# EAGLE board eagle (EAGLE 8.4.0)
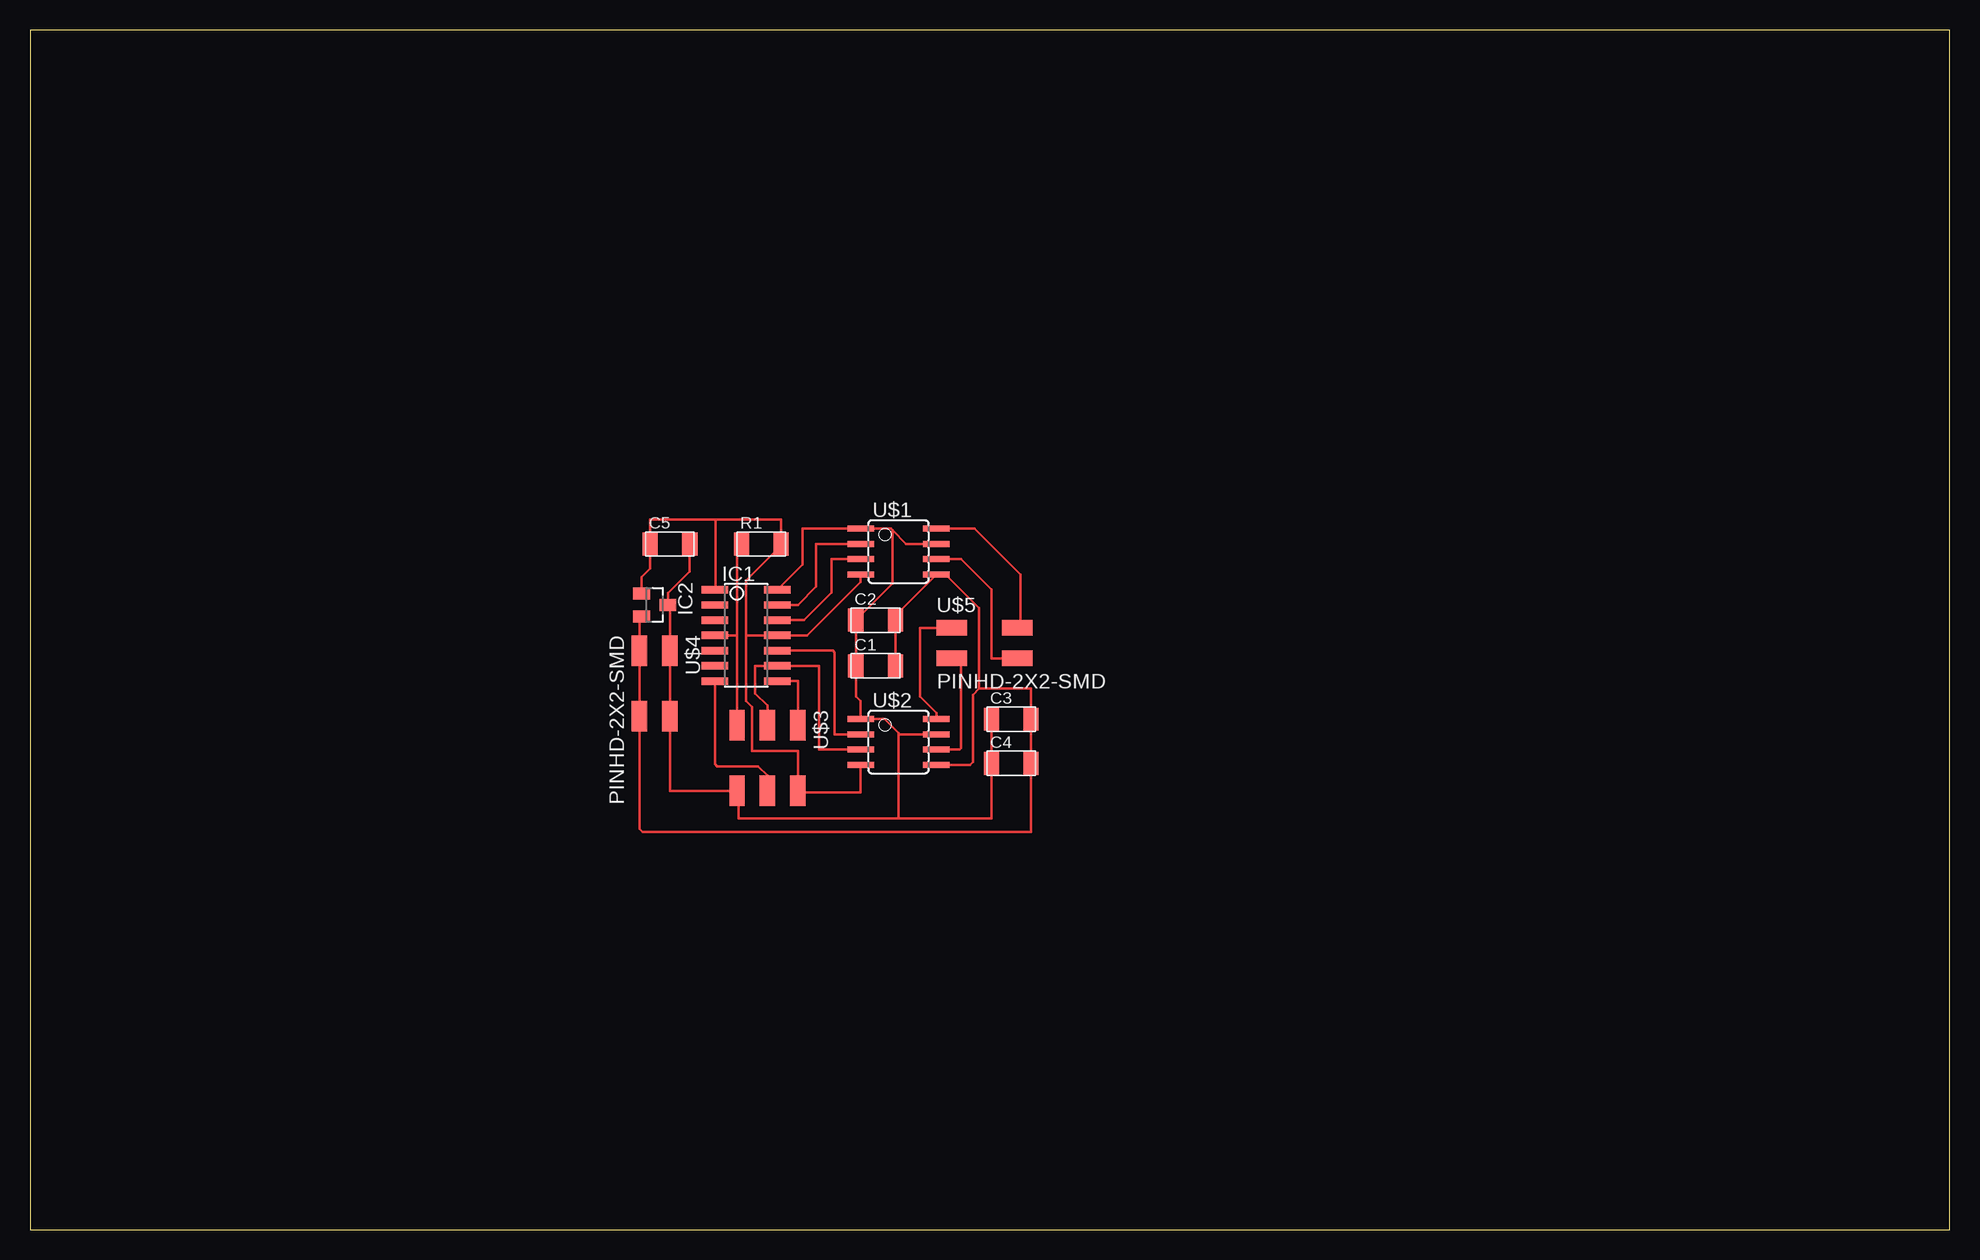
[diagram p0: board, top side]

Size 160 x 100 mm. Coordinates in mm from the lower left corner, seen from the top.
Outline: 0,0 160,0 160,100 0,100 0,0
Copper layers (1*16): Top 0.035mm / dielectric 1.5mm / Bottom 0.035mm
Design rules "default": minimum track width 6mil, minimum drill 0.35mm, track to track 6mil, track to pad 6mil, pad to pad 6mil, via to via 6mil, smd to smd 6mil, copper to edge 40mil, drill to drill 6mil, minimum pad ring 10mil, minimum via ring 8mil, stop-mask expansion 4mil, vias tented up to drill 0mil, thermal gap 10mil

## Footprints (pad centres in the part's own frame; a part is rotated, then mirrored left to right if it is on the bottom)
C1206FAB = smd 1.27 x 1.905: 1 -1.651,0; 2 1.651,0
SOIC14 = smd 0.61 x 2.21: 1 -3.81,-2.603; 2 -2.54,-2.603; 3 -1.27,-2.603; 4 0,-2.603; 5 1.27,-2.603; 6 2.54,-2.603; 7 3.81,-2.603; 8 3.81,2.603; 9 2.54,2.603; 10 1.27,2.603; 11 0,2.603; 12 -1.27,2.603; 13 -2.54,2.603; 14 -3.81,2.603
SOT23 = smd 1 x 1.4: 1 -0.95,-1.1; 2 0.95,-1.1; 3 0,1.1
R1206FAB = smd 1.27 x 1.905: 1 -1.651,0; 2 1.651,0
SOIC8 = smd 0.5 x 2.2: 1 -1.905,-3.154; 2 -0.645,-3.154; 3 0.625,-3.154; 4 1.895,-3.154; 5 1.905,3.154; 6 0.635,3.154; 7 -0.635,3.154; 8 -1.905,3.154
2X03SMD = smd 2.54 x 1.27: 1 -2.54,2.54; 2 2.92,2.54; 3 -2.54,0; 4 2.92,0; 5 -2.54,-2.54; 6 2.92,-2.54
2X02SMD = smd 2.54 x 1.27: 1 -2.54,1.27; 2 2.92,1.27; 3 -2.54,-1.27; 4 2.92,-1.27

## Placement (x,y rotation side)
C1  CAP-US1206FAB  [C1206FAB]  70.48,46.99 0 top
C2  CAP-US1206FAB  [C1206FAB]  70.48,50.8 0 top
C3  CAP-US1206FAB  [C1206FAB]  81.79,42.55 0 top
C4  CAP-US1206FAB  [C1206FAB]  81.79,38.86 0 top
C5  CAP-US1206FAB  [C1206FAB]  53.34,57.15 0 top
IC1  ATTINY44-SSU  [SOIC14]  59.69,49.53 270 top
IC2  [SOT23]  52.07,52.07 270 top
R1  [R1206FAB]  60.96,57.15 0 top
U$1  A4953-H-BRIDGE-MOTOR-DRIVER  [SOIC8]  72.39,56.52 270 top
U$2  A4953-H-BRIDGE-MOTOR-DRIVER  [SOIC8]  72.39,40.64 270 top
U$3  AVRISPSMD  [2X03SMD]  61.47,39.5 270 top
U$4  PINHD-2X2-SMD  [2X02SMD]  52.07,45.72 270 top
U$5  PINHD-2X2-SMD  [2X02SMD]  79.38,48.9 0 top

## Library data of the parts
C1-C5 IC1 IC2 R1 U$1-U$5 = fab (1)

## Nets
N$1: C1.1 C2.1 C3.1 C4.1 C5.2 IC1.14 IC2.3 U$1.1 U$1.7 U$2.1 U$2.7 U$3.6 U$4.1 U$4.2
N$3: IC1.7 U$3.4
N$4: IC1.4 R1.1 U$3.5
N$5: C5.1 IC1.1 IC1.11 IC2.1 R1.2 U$1.4 U$2.4 U$3.2
N$7: IC1.13 U$1.2
N$8: IC1.12 U$1.3
N$9: C1.2 C2.2 C3.2 C4.2 IC2.2 U$1.5 U$2.5 U$4.3 U$4.4
N$10: U$1.6 U$5.4
N$11: U$1.8 U$5.2
N$13: IC1.8 U$3.1
N$14: IC1.10 U$2.2
N$15: IC1.9 U$2.3 U$3.3
N$16: U$2.6 U$5.3
N$17: U$2.8 U$5.1

## Tracks (layer width: path | path; a pad name or v marks a point on that pad's centre or on a via)
N$1
  Top 0.229: U$4.2 U$4.1 53.34,51.9 IC2.3 53.17,53.04 54.99,54.86 C5.2 | U$4.2 53.34,42.16 | IC1.14 64.39,55.44 64.39,58.42 U$1.1 71.75,58.42 71.88,58.29 | U$1.7 73.03,57.15 71.88,58.29 | 71.88,58.29 71.88,53.85 C2.1 | C2.1 68.83,50.93 | C2.1 C1.1 68.83,44.45 69.24,44.05 U$2.1 71.25,42.55 72.39,41.4 | 72.39,34.29 80.14,34.29 C4.1 C3.1 | 72.39,34.29 59.05,34.29 59.05,36.45 U$3.6 53.34,36.58 U$4.2 | U$2.7 72.52,41.27 72.39,41.4 | 72.39,41.4 72.39,34.29
N$3
  Top 0.229: IC1.7 57.09,38.8 57.28,38.61 60.71,38.61 61.47,37.85 U$3.4
N$4
  Top 0.229: 58.93,49.53 IC1.4 | 58.93,49.53 U$3.5 | 58.93,55.37 58.93,55.24 | 58.93,55.24 58.93,49.53 | 58.93,55.24 58.93,56.64 59.05,56.77 59.05,56.9 R1.1
N$5
  Top 0.229: 57.15,59.18 57.15,53.4 IC1.1 | 59.69,49.53 59.69,44.07 60.2,43.56 60.2,39.88 64.01,39.88 U$3.2 64.14,36.45 69.22,36.45 69.24,36.47 U$2.4 | 59.69,49.53 IC1.11 64.77,49.53 69.24,54 U$1.4 | 59.69,49.53 59.69,54.1 62.61,57.02 R1.2 62.61,59.18 57.15,59.18 | 57.15,59.18 51.69,59.18 51.69,57.28 | 51.69,57.28 C5.1 | IC2.1 50.97,54.4 51.69,55.12 51.69,57.28
N$7
  Top 0.229: IC1.13 64.01,52.07 65.53,53.59 65.53,57.15 65.54,57.16 U$1.2
N$8
  Top 0.229: U$1.3 66.81,55.89 66.8,55.88 66.8,53.09 64.52,50.8 IC1.12
N$9
  Top 0.229: IC2.2 50.8,50.95 U$4.3 U$4.4 50.8,33.4 51.05,33.15 82.8,33.15 | 82.8,33.15 82.93,33.15 | U$2.5 78.36,38.73 78.61,38.99 78.61,44.58 79.12,45.09 | 79.12,45.09 79.12,51.82 76.33,54.61 U$1.5 72.14,51.2 C2.2 C1.2 | 79.12,45.09 83.44,45.09 C3.2 C4.2 83.44,33.15 82.8,33.15
N$10
  Top 0.229: U$1.6 77.6,55.88 80.14,53.34 80.14,47.62 U$5.4 82.17,47.5
N$11
  Top 0.229: U$1.8 78.74,58.42 82.55,54.61 82.55,50.42 U$5.2
N$13
  Top 0.229: U$3.1 64.01,45.72 IC1.8
N$14  (1 unrouted)
  Top 0.229: U$2.2 67.07,41.28 67.07,48.12 66.93,48.26 IC1.10
N$15
  Top 0.229: U$2.3 69.23,40.01 65.79,40.01 65.79,46.99 IC1.9 60.45,46.99 60.45,44.7 61.47,43.69 U$3.3
N$16
  Top 0.229: U$2.6 77.47,40.01 77.6,40.13 77.6,47.5 77.47,47.62 U$5.3
N$17
  Top 0.229: 74.3,50.16 74.17,50.16 | 74.3,50.16 U$5.1 | 75.42,42.42 U$2.8 75.54,43.07 74.17,44.45 74.17,50.04 74.3,50.16